# EAGLE board usbB_isp_no_lm2940 (EAGLE 6.4)
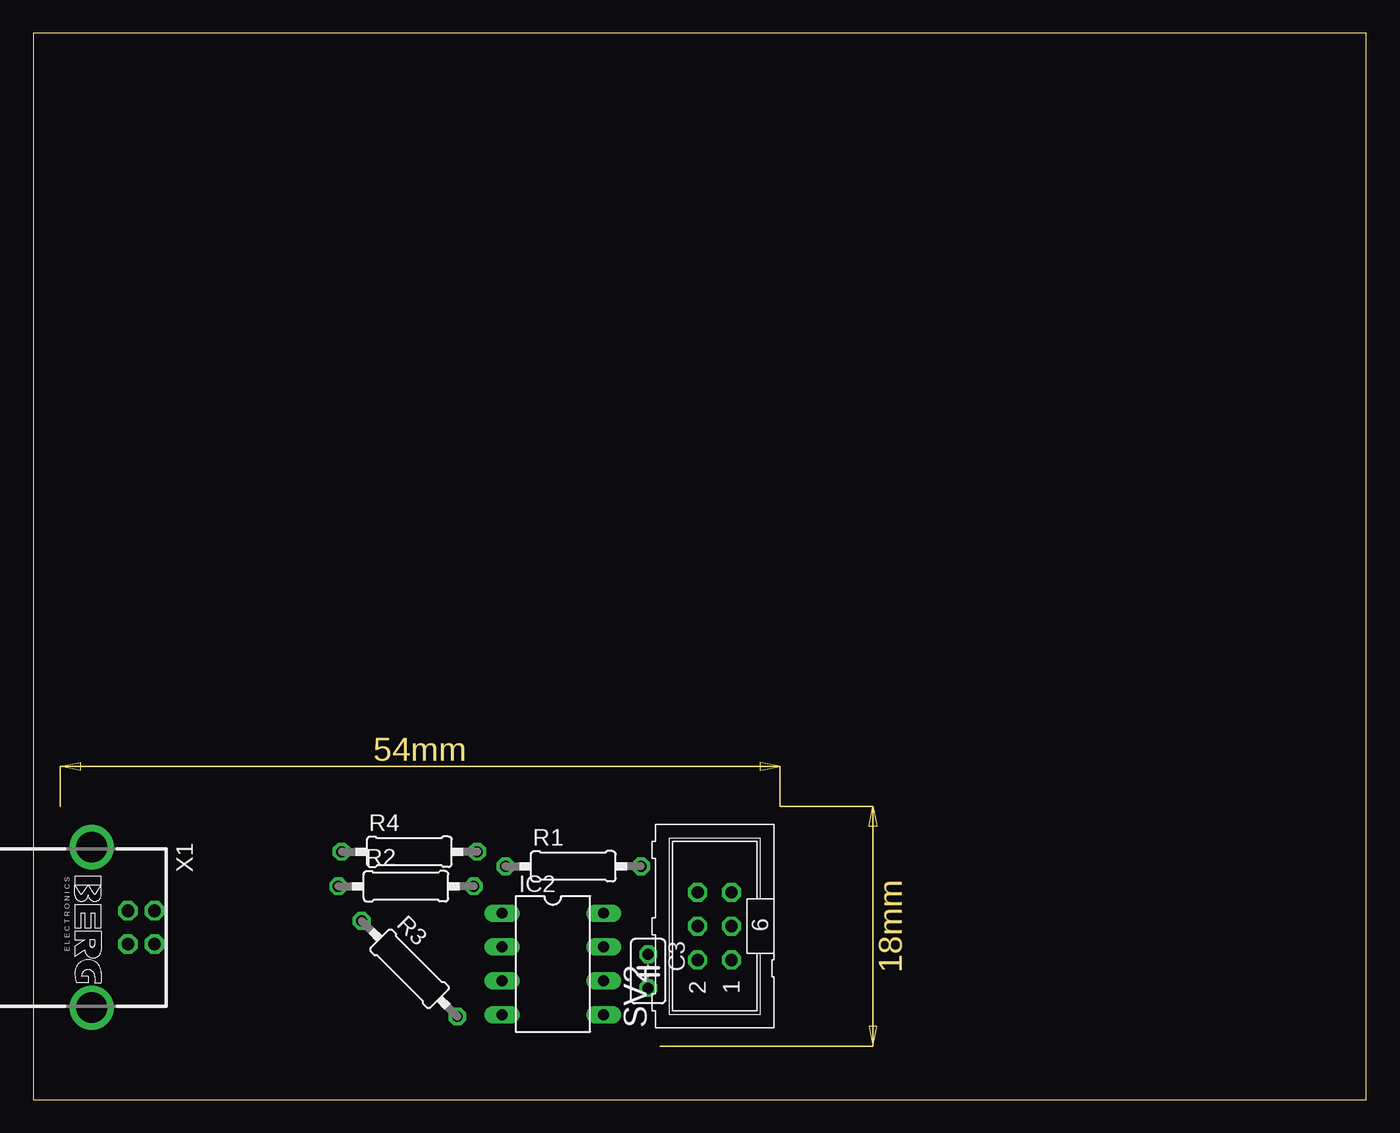
[diagram p0: board, top side]
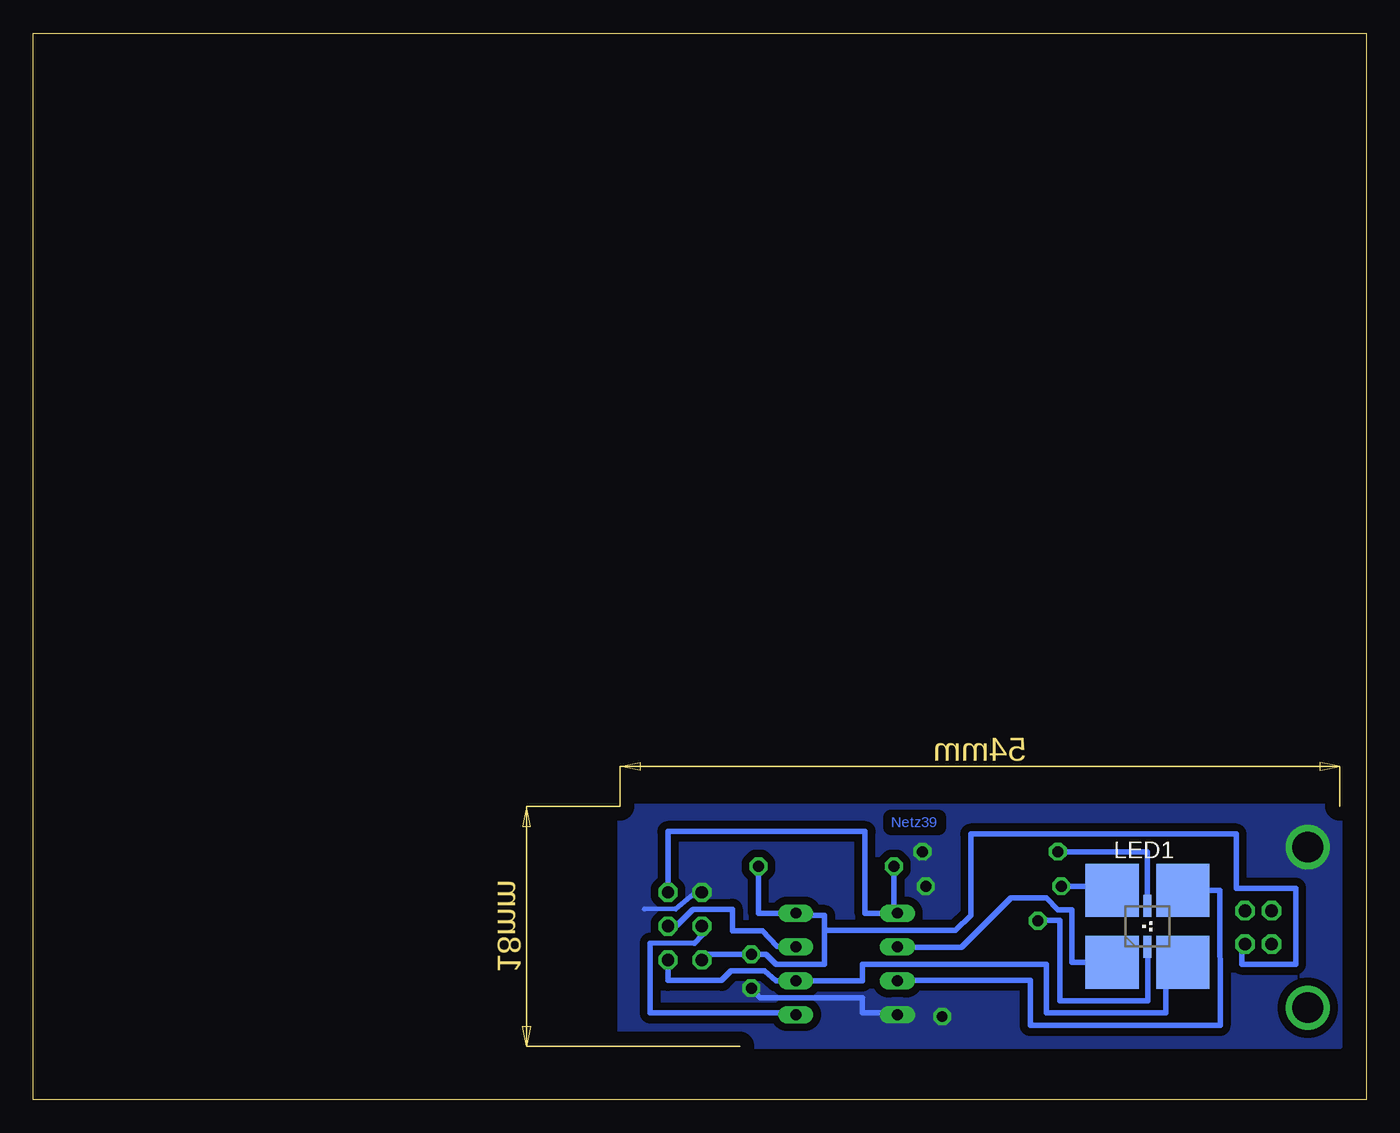
[diagram p1: board, bottom side, seen from below]

Size 100 x 80 mm. Coordinates in mm from the lower left corner, seen from the top.
Outline: 0,0 100,0 100,80 0,80 0,0
Copper layers (1*16): Top 0.035mm / dielectric 1.5mm / Bottom 0.035mm
Design rules "default *": minimum track width 12mil, minimum drill 24mil, track to track 12mil, track to pad 12mil, pad to pad 8mil, via to via 8mil, smd to smd 8mil, copper to edge 40mil, drill to drill 30mil, minimum pad ring 10mil, minimum via ring 8mil, stop-mask expansion 4mil, vias tented up to drill 0mil, thermal gap 10mil
Net classes: 0 default: clearance 0.355 mm

## Footprints (pad centres in the part's own frame; a part is rotated, then mirrored left to right if it is on the bottom)
C025-025X050 = drill 0.813 octagon: 1 -1.27,0; 2 1.27,0
DIL08 = drill 0.813 long: 1 -3.81,-3.81; 2 -1.27,-3.81; 3 1.27,-3.81; 4 3.81,-3.81; 5 3.81,3.81; 6 1.27,3.81; 7 -1.27,3.81; 8 -3.81,3.81
LRTB_G6SG = smd 4 x 4: 1 -2.65,-2.7; 3 2.65,-2.7; 4 2.65,2.7; 6 -2.65,2.7 | smd 0.6 x 1.65: 2 0,-1.525; 5 0,1.525
0207/10 = drill 0.813 octagon: 1 -5.08,0; 2 5.08,0
ML6 = drill 0.914 octagon: 1 -2.54,-1.27; 2 -2.54,1.27; 3 0,-1.27; 4 0,1.27; 5 2.54,-1.27; 6 2.54,1.27
PN61729-S = drill 0.95 octagon: 1 1.25,4.71; 2 -1.25,4.71; 3 -1.25,2.71; 4 1.25,2.71 | drill 2.3 pad 2.9: S1 -6.02,0; S2 6.02,0

## Placement (x,y rotation side)
C3  100n  [C025-025X050]  46.13,9.62 270 top
IC2  TINY13-20PU  [DIL08]  38.98,10.18 270 top
LED1  LRTB_G6SG  [LRTB_G6SG]  16.41,13 0 bottom
R1  10k  [0207/10]  40.51,17.5 0 top
R2  150  [0207/10]  27.96,16 0 top
R3  91  [0207/10]  28.22,9.81 315 top
R4  91  [0207/10]  28.21,18.59 0 top
SV2  PROG  [ML6]  51.11,13.01 90 top
X1  PN61729-S  [PN61729-S]  4.38,12.91 270 top

## Library data of the parts
C3 R1-R4 = resistor
IC2 = atmel; MPN: ATTINY13-20PU; OC_FARNELL: 9171550; OC_NEWARK: 96K6521
LED1 = led
SV2 = con-ml; OC_FARNELL: unknown; OC_NEWARK: unknown
X1 = con-berg; OC_FARNELL: unknown; OC_NEWARK: unknown

## Nets
_RESET: IC2.1 R1.1 SV2.5
GND: C3.2 IC2.4 R2.2 R3.2 R4.2 SV2.6 X1.S1
MISO: IC2.6 LED1.3 SV2.1
N$3: IC2.2 LED1.1
N$6: LED1.5 R4.1
N$7: LED1.2 R3.1
N$8: LED1.6 R2.1
N$9: IC2.3 LED1.4
N$10: IC2.5 SV2.4
SCK: IC2.7 SV2.3
VCC: C3.1 IC2.8 R1.2 SV2.2 X1.1

## Tracks (layer width: path | path; a pad name or v marks a point on that pad's centre or on a via)
_RESET
  Bottom 0.406: 52.35,15.58 SV2.5 52.38,20.12 37.59,20.12 37.59,13.99 IC2.1 35.43,14.25 R1.1
GND
  Bottom 0.381: 50.24,15.6 51.82,14.28 54.15,14.3
  Bottom 0.406: SV2.6 50.24,15.6 | 35.3,6.5 37.8,6.5 37.8,7.62 45.49,7.62 C3.2
  pour Bottom (isolate 0.584, no thermals): 2,4 2,22 56,22 56,4
MISO
  Bottom 0.406: LED1.3 15.04,10.3 15.04,6.5 23.98,6.5 23.98,10.16 37.8,10.16 37.8,8.91 IC2.6 44.26,8.91 45.14,9.65 47.65,9.65 48.36,8.94 52.38,8.94 SV2.1
N$3
  Bottom 0.406: LED1.1 22.1,10.3 22.1,14.22 23.11,14.22 24,15.11 26.67,15.11 30.35,11.43 35.15,11.43 IC2.2
N$6
  Bottom 0.406: LED1.5 16.41,18.59 R4.1
N$7
  Bottom 0.406: LED1.2 16.38,11.47 16.38,7.39 22.99,7.39 22.99,13.46 24.63,13.46 R3.1
N$8
  Bottom 0.406: 19.41,16 19.41,17 19.06,16.65 LED1.6 19.36,16 R2.1
N$9
  Bottom 0.406: LED1.4 10.97,15.7 10.95,5.56 25.2,5.56 25.2,8.94 35.17,8.94 IC2.3
N$10
  Bottom 0.381: 50.39,11.73 53.72,11.73
  Bottom 0.406: SV2.4 49.84,12.34 50.39,11.73 | 53.72,11.73 53.72,6.5 42.79,6.5 IC2.5
SCK
  Bottom 0.406: 52.35,13.13 52.38,13.09 SV2.3 51.69,13.08 50.55,14.22 50.47,14.28 47.55,14.28 47.55,12.65 45.29,12.65 44.21,11.5 42.84,11.5 IC2.7
VCC
  Bottom 0.406: 40.64,12.7 30.81,12.7 29.67,13.82 29.67,19.91 9.75,19.91 9.75,15.85 5.28,15.85 5.28,10.16 9.35,10.16 9.35,11.66 X1.1 | 40.64,12.7 40.64,13.82 42.79,13.82 IC2.8 45.59,13.99 R1.2 | 40.64,12.7 40.64,10.16 44.3,10.16 45.03,10.89 C3.1 49.84,10.89 SV2.2

## Text on the board
Bottom: Netz39